# Altium PCB 001_BMS_SLAVE.PcbDoc
Units mm, origin at the board's own origin, x right, y up, seen from the top; angles counter-clockwise.
Board outline 76.45 x 13.72 mm, 2 copper layers (Top Layer, Bottom Layer); 15 components, 11 nets, 35 pads, 0 vias.
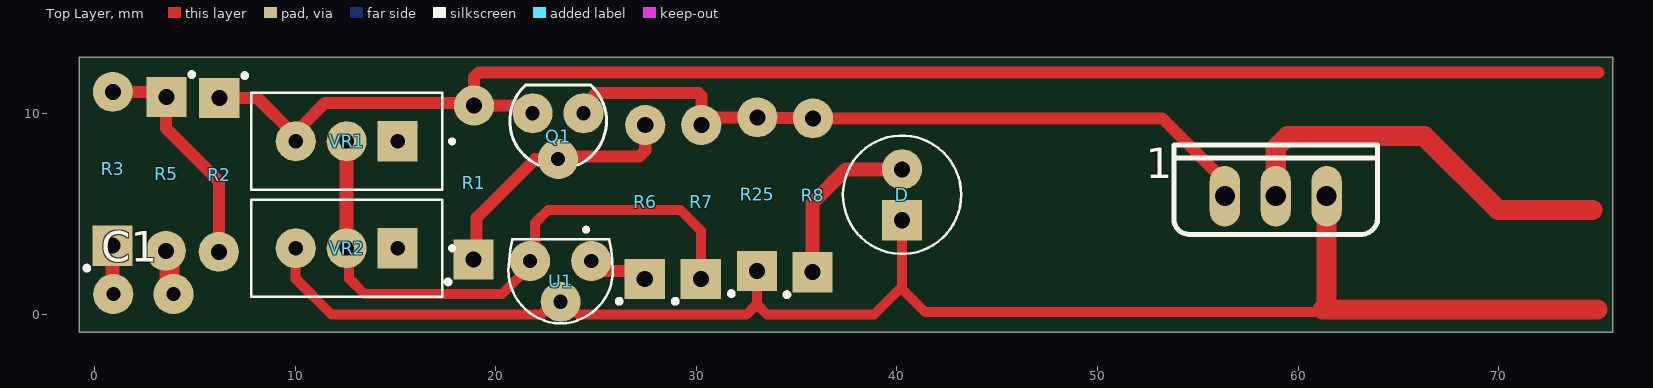
[diagram p0: Top Layer view]
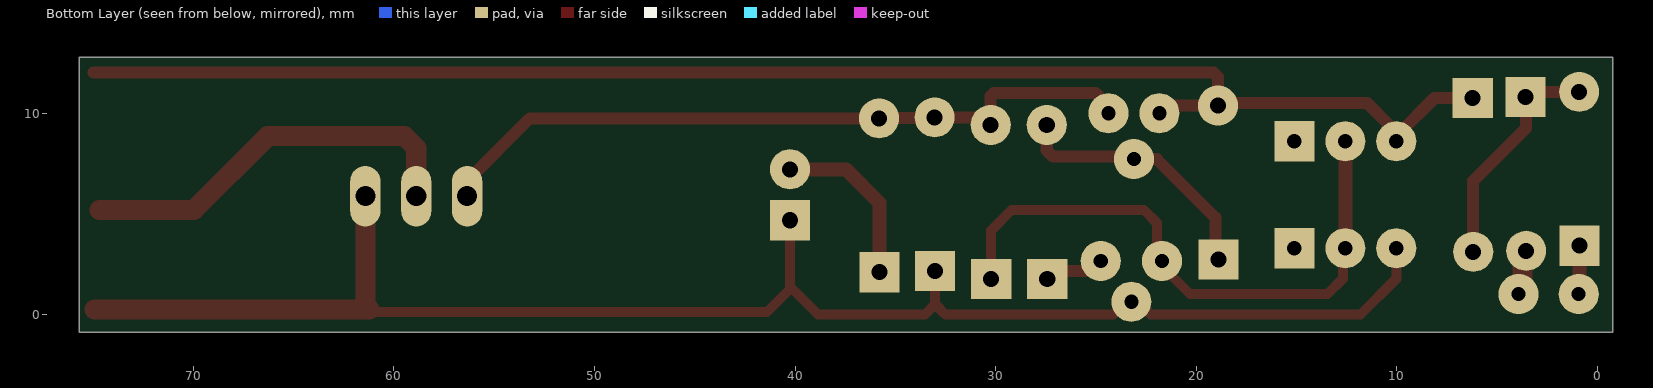
[diagram p1: Bottom Layer view, seen from below]
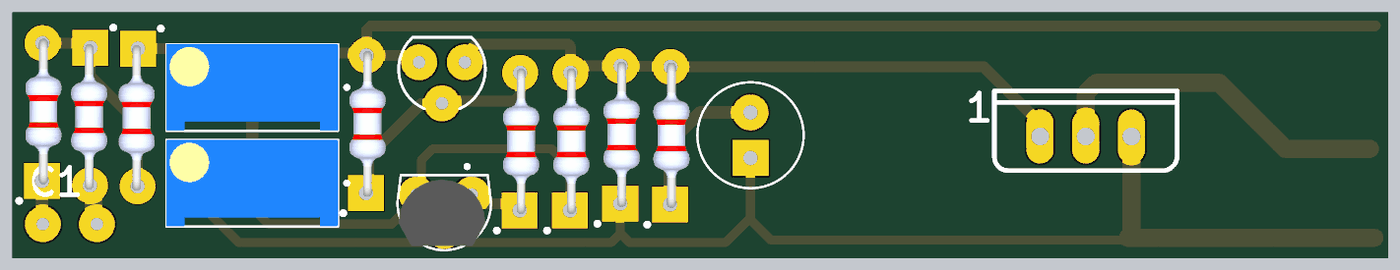
[diagram p2: 3D render of the assembled board from above, using the file's embedded part models]

## Layer stack, top to bottom
Top Solder: solder mask 0.0102, Solder Resist, Dk 3.5
Top Layer: signal copper 0.0356
Dielectric 1: dielectric 0.32, FR-4, Dk 4.8
Bottom Layer: signal copper 0.0356
Bottom Solder: solder mask 0.0102, Solder Resist, Dk 3.5

## Board outline
-0.762,-0.889 75.692,-0.889 75.692,12.827 -0.762,12.827

## Design rules (kind name [scope] priority, off if disabled: settings)
Clearance [All] p1: gap=0.254 ignorepadtopadclearanceinfootprint=FALSE except(0: Arc-Hole Track-Hole SMDPad-Hole THPad-Hole Via-Hole Fill-Hole Poly-Hole Region-Hole Text-Hole)
PolygonConnect [All] p1: connectstyle=Relief reliefconductorwidth=0.254 reliefentries=4 polygonreliefangle="90 Angle" airgapwidth=0.254
RoutingVias [All] p1: holewidth=0.711 width=1.27 viastyle="Through Hole" minholewidth=0.711 minwidth=1.27 maxholewidth=0.711 maxwidth=1.27
SolderMaskExpansion [All] p1: expansion=0.102 istentingtop=FALSE
Width [All] p1: maxlimit=10 minlimit=0.2 preferedwidth=0.254 bottomlayer_minwidth=0.254 bottomlayer_maxwidth=0.254 minimp=50.000000 maximp=50.000000 favimp=50.000000
30 further rules are at their usual default settings.

## Components (designator, comment, footprint, x,y, rotation, side; value= is the part's Value field where it differs from the comment)
1 "IRFZ44NPBF" IRFZ44N 58.889,5.9 r0 top
C1 "10nf_kutupsuz" 10NF_KUTUPSUZ 0.937,1.016 r0 top
D "LED_5MM" LED_5MM 40.259,5.969 r90 top
Q1 "BC557" BC557 23.114,9.652 r180 top
R1 "180" "100 RESISTOR" 18.898,2.718 r90 top
R2 "22K" "100 RESISTOR" 6.223,10.82 r270 top
R3 "100 resistor" "100 RESISTOR" 0.889,3.404 r90 top
R5 "680" "100 RESISTOR" 3.581,10.871 r270 top
R6 "150" "100 RESISTOR" 27.432,1.753 r90 top
R7 "220k" "100 RESISTOR" 30.226,1.753 r90 top
R8 "220" "100 RESISTOR" 35.789,2.083 r90 top
R25 "10K" "100 RESISTOR" 33.02,2.134 r90 top
U1 "TL431CLP_TO92" TL432_TO92 23.241,1.651 r180 top
VR1 "COK_TURLU_POT" COK_TURLU_POT 12.573,8.636 r180 top
VR2 "COK_TURLU_POT" COK_TURLU_POT 12.573,3.302 r180 top

## Footprints (in the part's own frame and the unit in brackets; to place one, negate y for a bottom-side part, rotate by r counter-clockwise, add the part's x,y. Pads: shape width x height; smd on the part's side, far side on the other; paste and mask are expansions set on the pad)
10NF_KUTUPSUZ [mm]
  round 2 hole 0.7: 1(0,0) 2(3,0)
"100 RESISTOR" [mm]
  rect 2x2 hole 0.8 mask+0.05: 1(0.025,0)
  round 2 hole 0.8 mask+0.05: 2(7.696,-0.025)
  silkscreen extent -1.18,1.18 -1,1.36, body extent -0.16,-1.08 7.94,0.92, height 2
BC557 [mm]
  round 2 hole 0.7: B(0,1.905) C(-1.27,-0.381) E(1.27,-0.381)
  silkscreen extent -2.41,-1.78 2.41,2.2
COK_TURLU_POT [mm]
  rect 2x2 hole 0.71: 1(-2.54,0)
  round 2 hole 0.71: 2(0,0) 3(2.54,0)
  silkscreen extent -5.35,-2.41 4.76,2.42, body extent -4.76,-2.42 4.76,2.41, height 11.55
IRFZ44N [mm]
  oval 1.508x3.016 hole 1: 1(-2.54,0) 2(0,0) 3(2.54,0)
  silkscreen extent -5.08,-1.91 5.08,2.54
LED_5MM [mm]
  round 2 hole 0.8: A(1.27,0)
  rect 2x2 hole 0.8: C(-1.27,0)
  silkscreen extent -2.95,-2.95 2.95,2.95
TL432_TO92 [mm]
  round 2 hole 0.7: 1(-1.524,-1.016) 2(0,1.016) 3(1.524,-1.016)
  silkscreen extent -2.61,-2.67 2.61,2.09, body extent -2.29,-1.84 2.54,1.84, height 5.34

## Part data
1: "RoHS Compliant", Package="TO-220 Infineon", Availability=Unavailable, MF=Infineon, MP=IRFZ44NPBF, Price=None, SnapEDA_Link=https://www.snapeda.com/parts/IRFZ44NPBF/Infineon%20Technologies/view-part/1662576/?ref=snap
D: "LED; 5mm; green; 5-32mcd; 60Â°; Front: convex", Package="CDIP-28 Kingbright", Availability=Unavailable, MF=Kingbright, MP=L-53GD, Price=None, SnapEDA_Link=https://www.snapeda.com/parts/L-53GD/Kingbright/view-part/525636/?ref=snap
Q1: "Bipolar _BJT_ Transistor PNP 45V 100mA 150MHz 500mW Through Hole TO-92-3", Package="TO-92 Rochester Electronics", Availability=Unavailable, MF=ON, MP=BC557, Price=None, SnapEDA_Link=https://www.snapeda.com/parts/BC557/ON%20Semiconductor/view-part/681642/?ref=snap
R1 R2 R5 R6 R7 R8 R25: library part "100 resistor"
U1: "Adjustable precision shunt regulator 3-TO-92 0 to 70", Package="TO-92 Texas Instruments", Availability=Good, Check_prices=https://www.snapeda.com/parts/TL431CLP/Texas%20Instruments/view-part/4478972/?ref=eda, MF="Texas Instruments", MP=TL431CLP, Price=None, Purchase-URL=https://pricing.snapeda.com/search/part/TL431CLP/?ref=eda, SnapEDA_Link=https://www.snapeda.com/parts/TL431CLP/Texas%20Instruments/view-part/4478972/?ref=snap
VR1 VR2: "30 kOhms 0.5W, 1/2W PC Pins Through Hole Trimmer Potentiometer Cermet 25 Turn Top Adjustment", Package="SOT-23-5 Bourns", Availability=Unavailable, Check_prices=https://www.snapeda.com/parts/3296W-1-303/Bourns/view-part/1485011/?ref=eda, MF=Bourns, MP=3296W-1-303, Price=None, SnapEDA_Link=https://www.snapeda.com/parts/3296W-1-303/Bourns/view-part/1485011/?ref=snap

## Nets (pads, with @x,y where several pads share a name; then routed paths per layer and width w, separated by ;. In a path a pad name is that pad's centre, name@x,y a point inside that pad or via, vN(x,y) a via of type N, cw(c..) or ccw(c..) an arc to the next point about the centre after c; other vN are vias at no path point)
GND: 1.3 D.C R25.1 U1.2 VR2.3 | length 80
  Top Layer w0.5: VR2.3 10.033,1.778 11.811,0 22.277,0 22.912,0.635 U1.2 23.505,0.635 24.14,0 32.512,0 33.02,0.508 ; R25.1 33.02,0.508 ; D.C 40.259,1.397 ; 61.224,0.127 41.402,0.127 40.259,1.27 40.259,1.397 ; 61.224,0.254 61.429,0.459 ; 33.02,0.508 33.528,0 38.862,0 40.259,1.397
  Top Layer w1: 61.224,0.254 74.924,0.254 ; 61.429,0.459 1.3
Net1_1: 1.1 Q1.C R7.2 R8.2 R25.2 | length 36.4
  Top Layer w0.6: Q1.C@24.384,9.652 Q1.C@24.536,9.804 ; Q1.C@24.536,9.677 24.536,10.566 25.019,11.049 30.103,11.049 30.251,10.9 R7.2@30.251,9.703 ; R7.2@30.251,9.83 R25.2 33.071,9.804 35.789,9.804 R8.2 53.224,9.779 56.349,6.654 1.1
NetC1_1: C1.1 R3.1 | length 1.6
  Top Layer w0.4: C1.1@0.889,1.143 C1.1@1.016,1.016
  Top Layer w0.7: C1.1@0.889,1.143 R3.1@0.889,2.54
NetC1_2: C1.2 R5.2 | length 2.3
  Top Layer w0.254: R5.2 R5.2@3.746,2.984 ; C1.2@3.746,1.206 C1.2
  Top Layer w1: C1.2@3.746,1.206 R5.2@3.746,2.984
NetD_A: D.A R8.1 | length 8.6
  Top Layer w0.7: R8.1 35.789,5.563 37.465,7.239 D.A
NetQ1_B: Q1.B R1.1 R6.2 | length 13.6
  Top Layer w0.6: R1.1 19.05,2.896 19.05,4.826 21.971,7.747 Q1.B 23.241,7.874 27.156,7.874 27.457,8.175 R6.2@27.457,9.83
NetR2_2: R2.2 R3.2 R5.1 | length 11.3
  Top Layer w0.6: R3.2 3.327,11.1 R5.1 3.556,10.82 3.556,9.296 6.198,6.655 R2.2@6.198,3.378
NetR6_1: R6.1 U1.1 | length 3.1
  Top Layer w0.4: U1.1@24.511,2.667 24.775,2.667 U1.1@25.283,2.159
  Top Layer w0.6: U1.1@25.283,2.159 R6.1@27.432,2.159
NetR7_1: R7.1 U1.3 VR1.2 VR2.2 | length 30.4
  Top Layer w0.5: VR2.2 12.7,3.175 12.7,1.778 13.462,1.016 20.32,1.016 21.971,2.667 21.971,4.572 22.606,5.207 29.21,5.207 30.226,4.191 R7.1
  Top Layer w0.7: VR2.2 VR1.2
OffSheet: 1.2 | length 20
  Top Layer w1: 1.2 58.889,8.304 59.475,8.89 66.294,8.89 69.977,5.207 74.676,5.207
VCC: Q1.E R1.2 R2.1 VR1.3 | length 75
  Top Layer w0.6: R2.1 8.128,10.795 9.933,8.99 10.089,8.99 10.361,9.261 10.361,9.418 11.484,10.541 18.796,10.541 R1.2 ; Q1.E@21.844,9.652 21.082,10.414 R1.2 ; 74.975,12.065 19.157,12.065 18.923,11.831 R1.2
pads on no net: VR1.1 VR2.1